# Altium PCB STM32_F4VE.PcbDoc
Units mil, origin at the board's own origin, x right, y up, seen from the top; angles counter-clockwise.
Board outline 4870 x 4565 mil, 2 copper layers (TopLayer, BottomLayer); 16 components, 107 nets, 308 pads, 0 vias.
Unrouted connection lines stored in the file: 187.
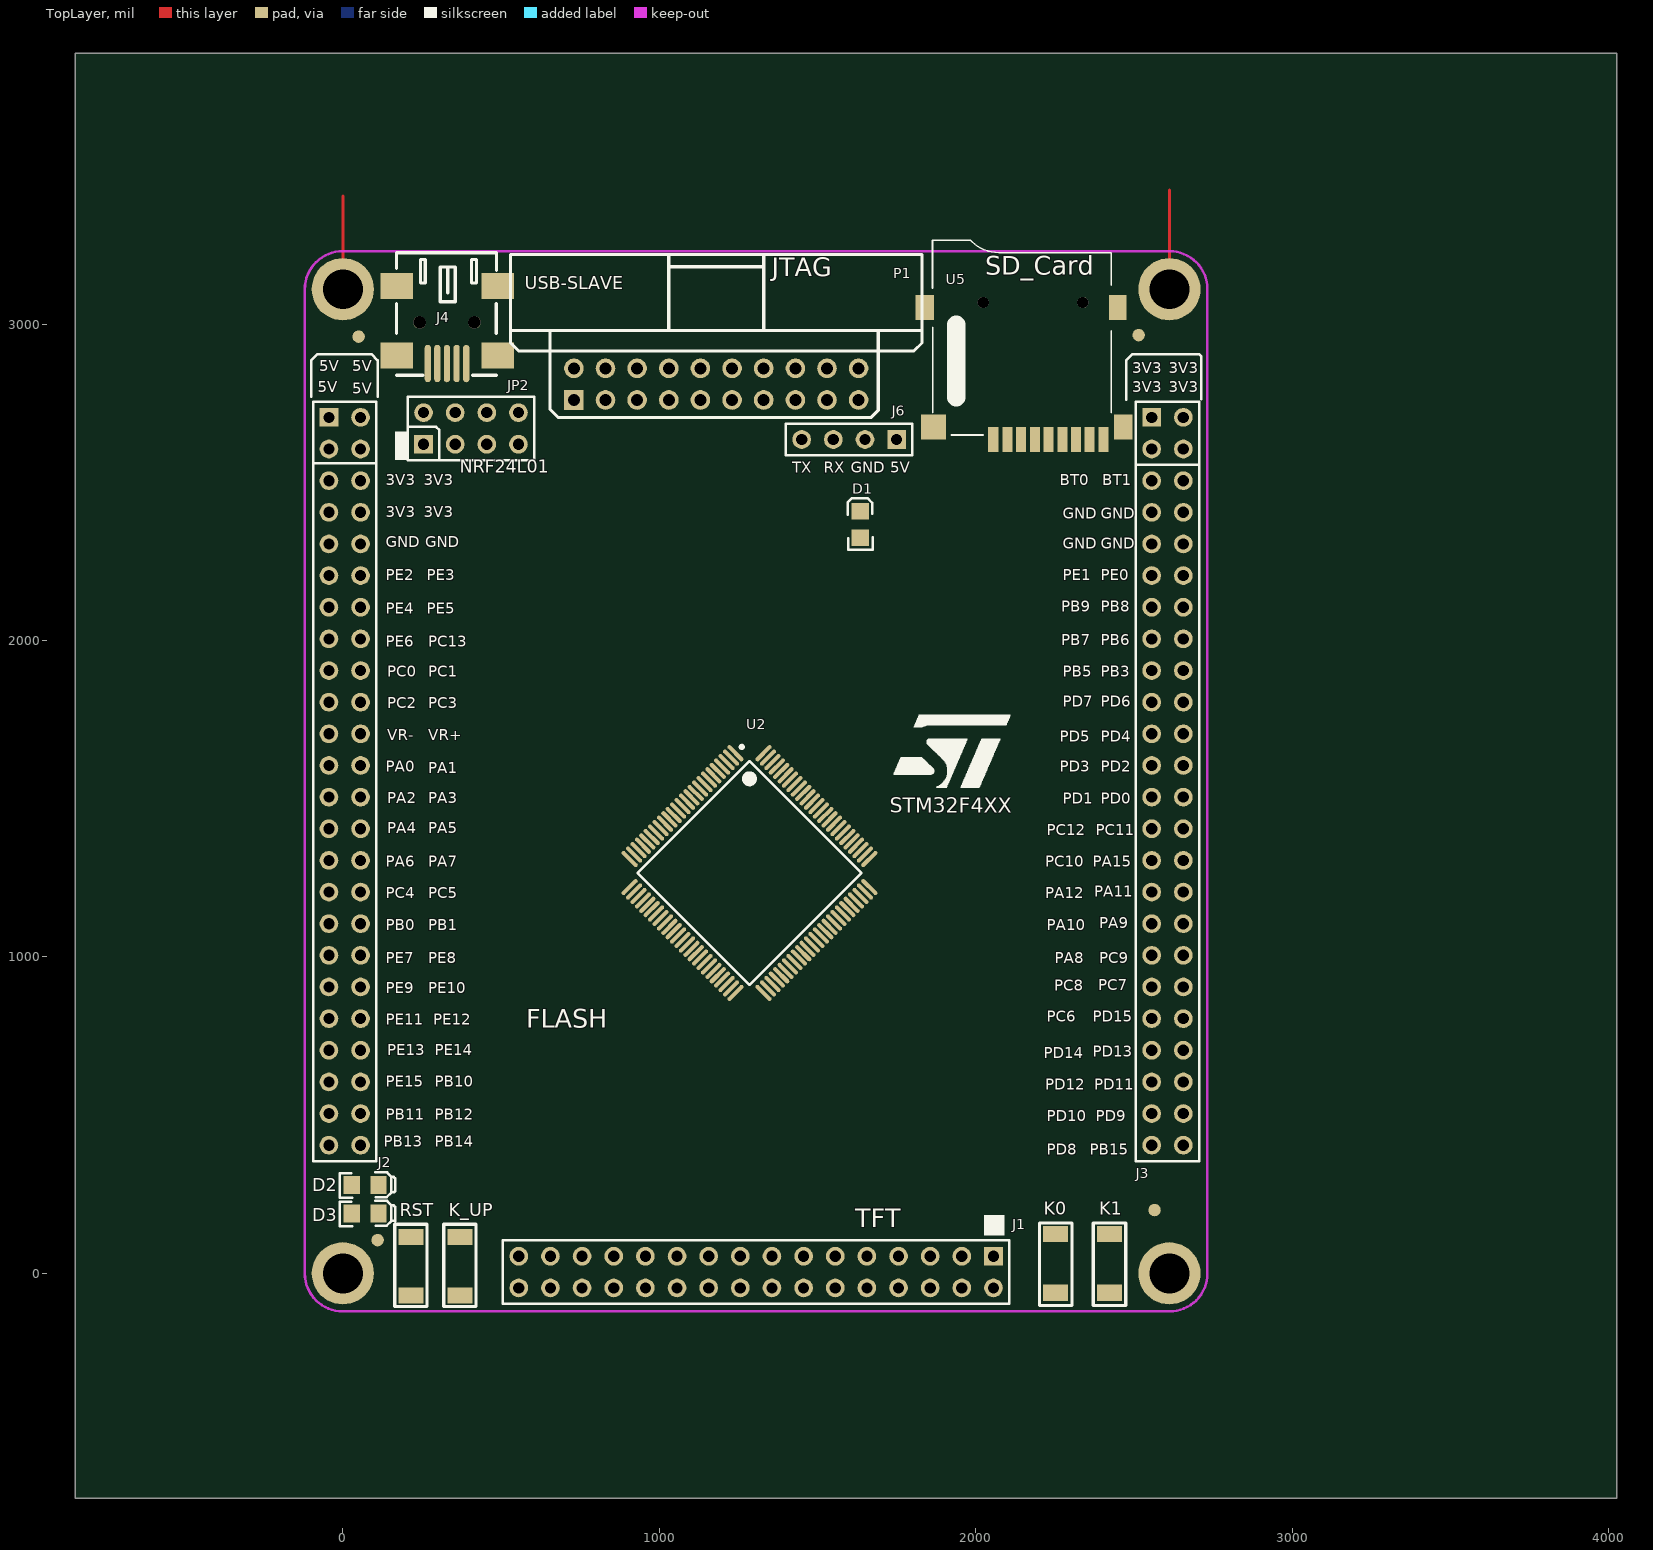
[diagram p0: TopLayer view]
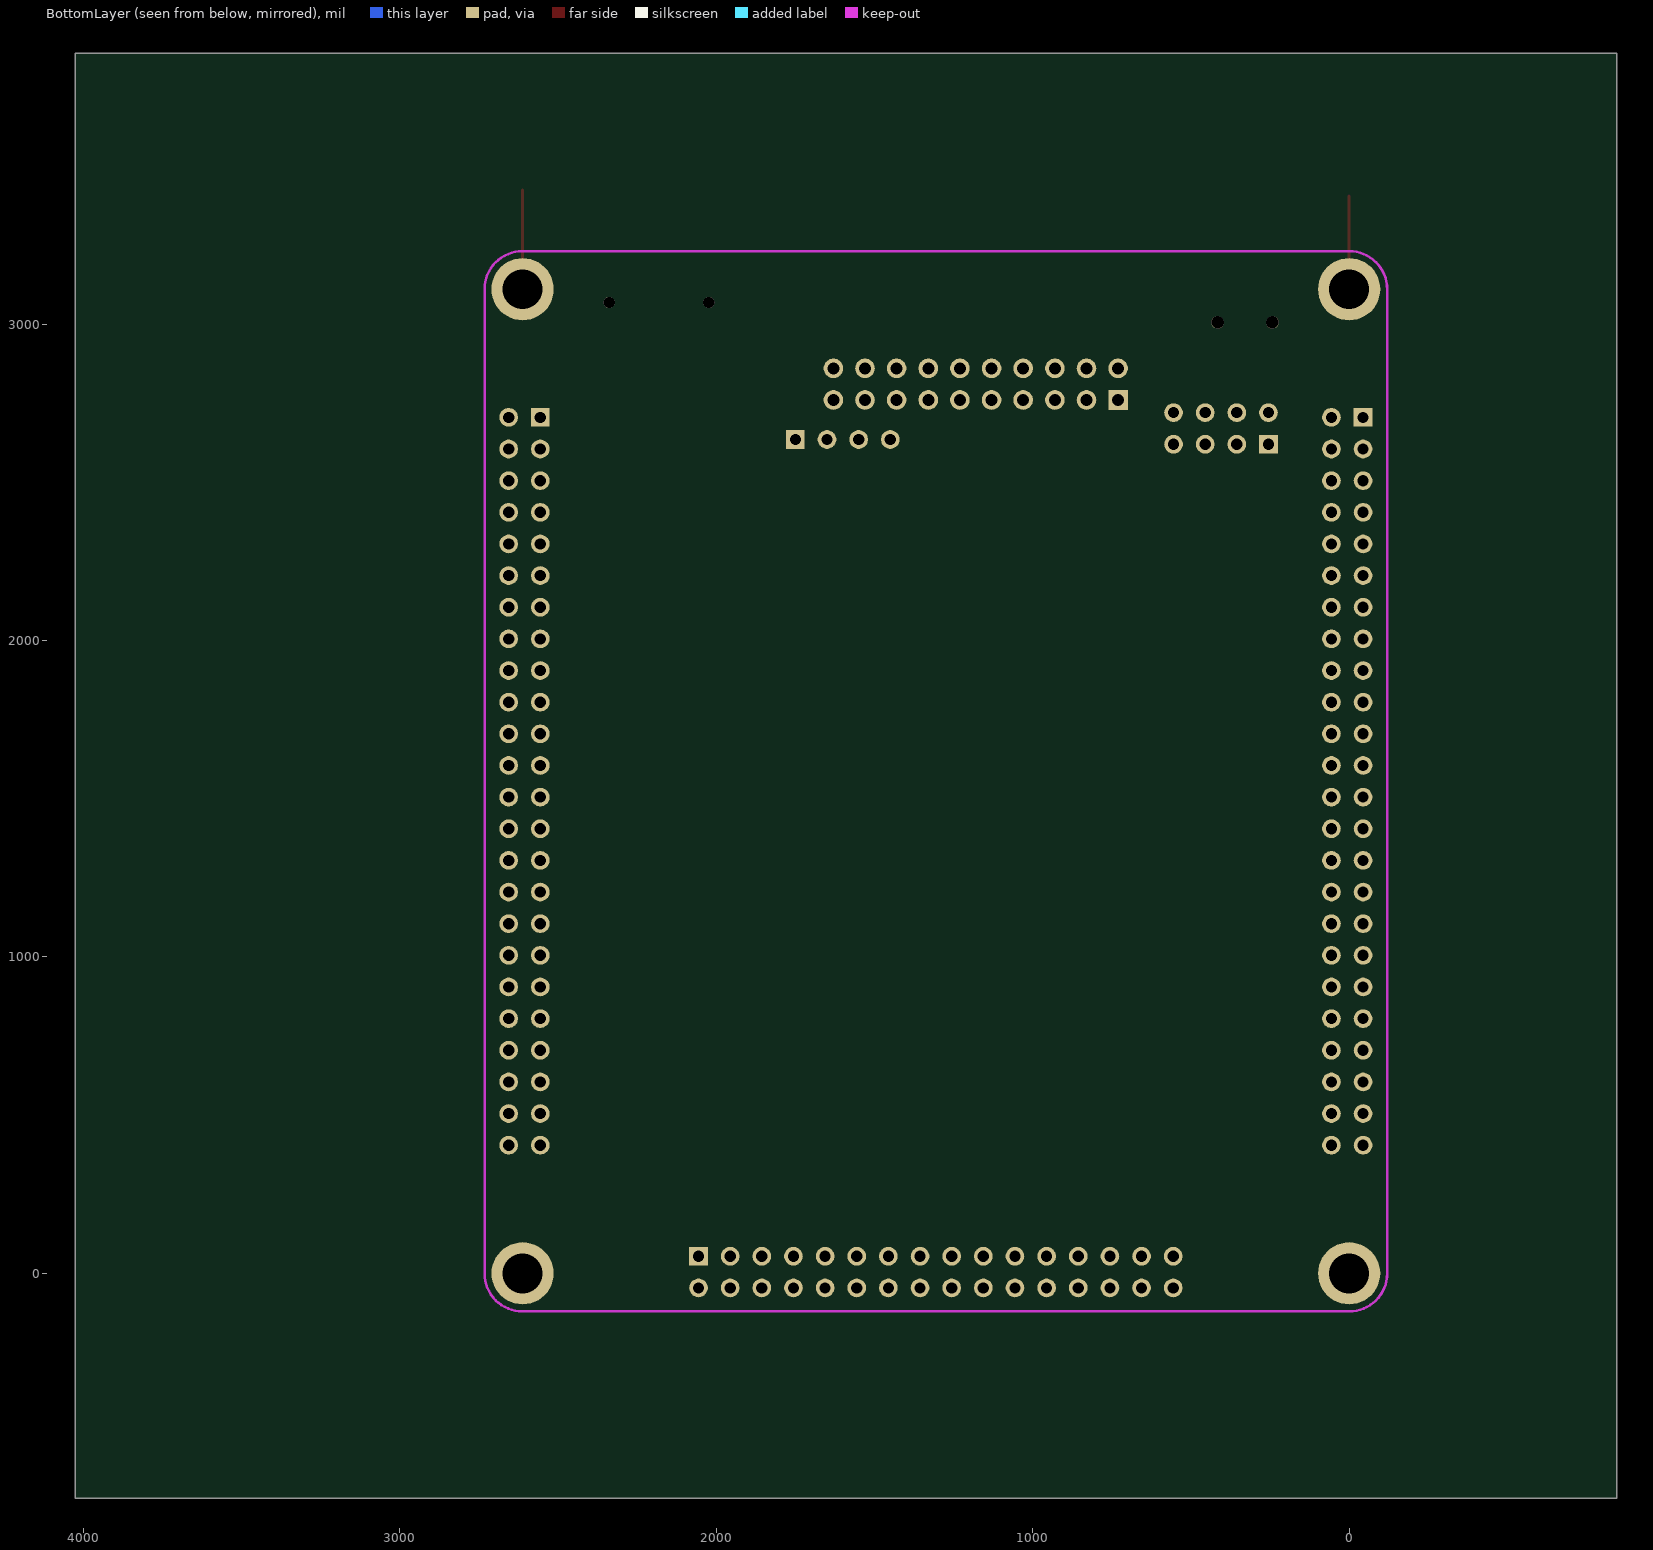
[diagram p1: BottomLayer view, seen from below]

## Layer stack, top to bottom
TopSolder: solder mask 0.4, Solder Resist, Dk 3.5
TopLayer: signal copper 1.4
Dielectric1: core 12.6, FR-4, Dk 4.8
BottomLayer: signal copper 1.4
BottomSolder: solder mask 0.4, Solder Resist, Dk 3.5

## Board outline
-845,-710 -845,3855 4025,3855 4025,-710

## Design rules (kind name [scope] priority, off if disabled: settings)
Clearance [All] p1: gap=16 ignorepadtopadclearanceinfootprint=FALSE except(0: Arc-Hole Track-Hole SMDPad-Hole THPad-Hole Via-Hole Fill-Hole Poly-Hole Region-Hole Text-Hole)
ComponentClearance [All] p1: gap=1 collisioncheckmode=3 verticalgap=1 showdistances=FALSE
DiffPairsRouting DiffPairsRouting_1 [All] p2: maxlimit=10 minlimit=10 mostfreqgap=10 toplayer_minwidth=15 toplayer_maxwidth=15 toplayer_prefwidth=15 bottomlayer_minwidth=15 bottomlayer_maxwidth=15 bottomlayer_prefwidth=15 maxuncoupledlength=500
FabricationTestPointUsage TestPointUsage [All] p1: valid=0 allowmultiple=FALSE
FabricationTestPointUsage TestPointUsage_1 [All] p2: valid=0 allowmultiple=FALSE
FabricationTestpoint Testpoint [(IsPad And (OnTopLayer Or OnBottomLayer))] p1: side=3 testpointundercomponent=TRUE minsize=40 maxsize=100 preferedsize=60 minholesize=0 maxholesize=40 preferedholesize=32 testpointgrid=1 allowsidetop=TRUE allowsidebottom=TRUE usegrid=TRUE gridtolerance=0.01
FabricationTestpoint Testpoint_1 [(IsPad And (OnTopLayer Or OnBottomLayer))] p2: side=3 testpointundercomponent=TRUE minsize=40 maxsize=100 preferedsize=60 minholesize=20 maxholesize=40 preferedholesize=32 testpointgrid=1 allowsidetop=TRUE allowsidebottom=TRUE usegrid=TRUE gridtolerance=0.01
FanoutControl Fanout_LCC [IsLCC] p1: bgadir=Out bgaviamode=Centered fanoutstyle=Auto fanoutdirection=Alternating viagrid=1 // Fanout_LCC (Default Rule)
FanoutControl Fanout_BGA [IsBGA] p2: bgadir=Out bgaviamode=Centered fanoutstyle=Auto fanoutdirection=Alternating viagrid=1 // Fanout_BGA (Default Rule)
FanoutControl Fanout_Default [All] p4: bgadir=Out bgaviamode=Centered fanoutstyle=Auto fanoutdirection=Alternating viagrid=1 // Fanout_Default (Default Rule)
FanoutControl Fanout_Small [(CompPinCount < 5)] p5: bgadir=Out bgaviamode=Centered fanoutstyle=Auto fanoutdirection=OutThenIn viagrid=1 // Fanout_Small (Default Rule)
FanoutControl Fanout_BGA_1 [IsBGA] p6: bgadir=Out bgaviamode=Centered fanoutstyle=Auto fanoutdirection=Alternating viagrid=1 // Fanout_BGA (Default Rule)
FanoutControl Fanout_LCC_1 [IsLCC] p7: bgadir=Out bgaviamode=Centered fanoutstyle=Auto fanoutdirection=Alternating viagrid=1 // Fanout_LCC (Default Rule)
FanoutControl Fanout_SOIC_1 [IsSOIC] p8: bgadir=Out bgaviamode=Centered fanoutstyle=Auto fanoutdirection=Alternating viagrid=1 // Fanout_SOIC (Default Rule)
FanoutControl Fanout_Small_1 [(CompPinCount < 5)] p9: bgadir=Out bgaviamode=Centered fanoutstyle=Auto fanoutdirection=OutThenIn viagrid=1 // Fanout_Small (Default Rule)
FanoutControl Fanout_Default_1 [All] p10: bgadir=Out bgaviamode=Centered fanoutstyle=Auto fanoutdirection=Alternating viagrid=1 // Fanout_Default (Default Rule)
HoleSize HoleSize_1 [All] p2: absolutevalues=TRUE maxlimit=100 minlimit=1 maxpercent=80.000 minpercent=20.000
LayerPairs LayerPairs_1 [All] p2: enforce=TRUE
PasteMaskExpansion PasteMaskExpansion_1 [All] p2: expansion=0
PlaneClearance PlaneClearance_1 [All] p2: clearance=0
PlaneConnect [All] p1: planeconnectstyle=Direct reliefexpansion=20 reliefentries=4 reliefconductorwidth=10 reliefairgap=10
PolygonConnect [(InPadClass('All Pads'))] p1: connectstyle=Relief reliefconductorwidth=10 reliefentries=4 polygonreliefangle="90 Angle" airgapwidth=10
PolygonConnect PolygonConnect_1 [All] p2: connectstyle=Direct reliefconductorwidth=10 reliefentries=4 polygonreliefangle="90 Angle" airgapwidth=10
RoutingPriority RoutingPriority_1 [All] p2: routingpriority=0
RoutingTopology RoutingTopology_1 [All] p2: topology=Shortest
RoutingVias [All] p1: holewidth=12 width=20 viastyle="Through Hole" minholewidth=12 minwidth=20 maxholewidth=12 maxwidth=20
ShortCircuit ShortCircuit_1 [All] p2: allowed=FALSE
SilkToSolderMaskClearance SilkscreenOverComponentPads [IsPad] p1: minsilkscreentomaskgap=10 clearancetoexposedcopper=TRUE
SolderMaskExpansion [All] p1: expansion=4
SolderMaskExpansion SolderMaskExpansion_1 [All] p2: expansion=4
UnRoutedNet UnRoutedNet_1 [All] p2:
Width [All] p1: maxlimit=40 minlimit=7.87 preferedwidth=7.87 minimp=50.000000 maximp=50.000000 favimp=50.000000
21 further rules are at their usual default settings.

## Classes and differential pairs
component class STM32_F4VE: D2 D3 J1 J2 J3 J4 J6 JP2 K0 K_UP P1 R17 RST U2 U5

## Components (designator, comment, footprint, x,y, rotation, side; value= is the part's Value field where it differs from the comment)
D1 "LED" LED0805 1635,2325 r90 top
D2 "LED" LED0805 28.68,278.97 r0 top
D3 "LED" LED0805 28.68,188.97 r0 top
J1 "Header 16X2" IDE2X16 2056.02,53.97 r180 top
J2 "Header 24X2" IDE2X24 -43.98,2705 r270 top
J3 "Header 24X2" IDE2X24 2556.02,2705 r270 top
J4 "usb" Mini_USB 390,2875 r0 top
J6 "ISP_COM" HDR1X4 1750,2635 r180 top
JP2 "NRF2401" IDE2X4 255,2620 r0 top
K0 "SW-PB" SW-SPST 2252.68,123.97 r270 top
K1 "SW-PB" SW-SPST 2422.68,123.97 r270 top
K_UP "SW-PB" SW-SPST 370,-70 r90 top
P1 "ARM_JTAG" JTAG-20P 730,2760 r0 top
RST "SW-PB" SW-SPST 215,-70 r90 top
U2 "STM32F407VET6" LQFP100 1285,1265 r315 top
U5 "MiniSD" TF_SD 2055,2635 r0 top

## Footprints (in the part's own frame and the unit in brackets; to place one, negate y for a bottom-side part, rotate by r counter-clockwise, add the part's x,y. Pads: shape width x height; smd on the part's side, far side on the other; paste and mask are expansions set on the pad)
HDR1X4 [mm] "Connector; Header; 4 Position"
  rect 1.5x1.5 hole 0.9: 1(0,0)
  round 1.5 hole 0.9: 2(2.54,0) 3(5.08,0) 4(7.62,0)
  silkscreen extent -1.27,-1.27 8.89,1.27
IDE2X4 [mm]
  rect 1.5x1.5 hole 0.9: 1(0,0)
  round 1.5 hole 0.9: 2(0,2.54) 3(2.54,0) 4(2.54,2.54) 5(5.08,0) 6(5.08,2.54) 7(7.62,0) 8(7.62,2.54)
  silkscreen extent -1.27,-1.27 8.89,3.81
IDE2X16 [mm]
  rect 1.5x1.5 hole 0.9: 1(0,0)
  round 1.5 hole 0.9: 2(0,2.54) 3(2.54,0) 4(2.54,2.54) 5(5.08,0) 6(5.08,2.54) 7(7.62,0) 8(7.62,2.54) 9(10.16,0) 10(10.16,2.54) 11(12.7,0) 12(12.7,2.54) 13(15.24,0) 14(15.24,2.54) 15(17.78,0) 16(17.78,2.54) 17(20.32,0) 18(20.32,2.54) 19(22.86,0) 20(22.86,2.54) 21(25.4,0) 22(25.4,2.54) 23(27.94,0) 24(27.94,2.54) 25(30.48,0) 26(30.48,2.54) 27(33.02,0) 28(33.02,2.54) 29(35.56,0) 30(35.56,2.54) 31(38.1,0) 32(38.1,2.54)
  silkscreen extent -1.27,-3.3 39.37,3.81
IDE2X24 [mm]
  rect 1.5x1.5 hole 0.9: 1(0,0)
  round 1.5 hole 0.9: 2(0,2.54) 3(2.54,0) 4(2.54,2.54) 5(5.08,0) 6(5.08,2.54) 7(7.62,0) 8(7.62,2.54) 9(10.16,0) 10(10.16,2.54) 11(12.7,0) 12(12.7,2.54) 13(15.24,0) 14(15.24,2.54) 15(17.78,0) 16(17.78,2.54) 17(20.32,0) 18(20.32,2.54) 19(22.86,0) 20(22.86,2.54) 21(25.4,0) 22(25.4,2.54) 23(27.94,0) 24(27.94,2.54) 25(30.48,0) 26(30.48,2.54) 27(33.02,0) 28(33.02,2.54) 29(35.56,0) 30(35.56,2.54) 31(38.1,0) 32(38.1,2.54) 33(40.64,0) 34(40.64,2.54) 35(43.18,0) 36(43.18,2.54) 37(45.72,0) 38(45.72,2.54) 39(48.26,0) 40(48.26,2.54) 41(50.8,0) 42(50.8,2.54) 43(53.34,0) 44(53.34,2.54) 45(55.88,0) 46(55.88,2.54) 47(58.42,0) 48(58.42,2.54)
  silkscreen extent -1.27,-1.27 59.69,3.81
JTAG-20P [mil]
  rect 62x62 hole 38: 1(0,0)
  round 62 hole 38: 2(0,100) 3(100,0) 4(100,100) 5(200,0) 6(200,100) 7(300,0) 8(300,100) 9(400,0) 10(400,100) 11(500,0) 12(500,100) 13(600,0) 14(600,100) 15(700,0) 16(700,100) 17(800,0) 18(800,100) 19(900,0) 20(900,100)
  silkscreen extent -200,-55 1100,460
LED0805 [mil]
  rect 52x56 smd: 1(0,0) 2(84,0)
  silkscreen extent -38,-40 125,40
LQFP100 [mm] "LQFP, 100-Leads, Body 16.2x16.2mm (max), Pitch 0.50mm, IPC Medium Density"
  oval 1.7x0.33 smd: 1(-7.6,6) 2(-7.6,5.5) 3(-7.6,5) 4(-7.6,4.5) 5(-7.6,4) 6(-7.6,3.5) 7(-7.6,3) 8(-7.6,2.5) 9(-7.6,2) 10(-7.6,1.5) 11(-7.6,1) 12(-7.6,0.5) 13(-7.6,0) 14(-7.6,-0.5) 15(-7.6,-1) 16(-7.6,-1.5) 17(-7.6,-2) 18(-7.6,-2.5) 19(-7.6,-3) 20(-7.6,-3.5) 21(-7.6,-4) 22(-7.6,-4.5) 23(-7.6,-5) 24(-7.6,-5.5) 25(-7.6,-6) 51(7.6,-6) 52(7.6,-5.5) 53(7.6,-5) 54(7.6,-4.5) 55(7.6,-4) 56(7.6,-3.5) 57(7.6,-3) 58(7.6,-2.5) 59(7.6,-2) 60(7.6,-1.5) 61(7.6,-1) 62(7.6,-0.5) 63(7.6,0) 64(7.6,0.5) 65(7.6,1) 66(7.6,1.5) 67(7.6,2) 68(7.6,2.5) 69(7.6,3) 70(7.6,3.5) 71(7.6,4) 72(7.6,4.5) 73(7.6,5) 74(7.6,5.5) 75(7.6,6)
  oval 0.33x1.7 smd: 26(-6,-7.6) 27(-5.5,-7.6) 28(-5,-7.6) 29(-4.5,-7.6) 30(-4,-7.6) 31(-3.5,-7.6) 32(-3,-7.6) 33(-2.5,-7.6) 34(-2,-7.6) 35(-1.5,-7.6) 36(-1,-7.6) 37(-0.5,-7.6) 38(0,-7.6) 39(0.5,-7.6) 40(1,-7.6) 41(1.5,-7.6) 42(2,-7.6) 43(2.5,-7.6) 44(3,-7.6) 45(3.5,-7.6) 46(4,-7.6) 47(4.5,-7.6) 48(5,-7.6) 49(5.5,-7.6) 50(6,-7.6) 76(6,7.6) 77(5.5,7.6) 78(5,7.6) 79(4.5,7.6) 80(4,7.6) 81(3.5,7.6) 82(3,7.6) 83(2.5,7.6) 84(2,7.6) 85(1.5,7.6) 86(1,7.6) 87(0.5,7.6) 88(0,7.6) 89(-0.5,7.6) 90(-1,7.6) 91(-1.5,7.6) 92(-2,7.6) 93(-2.5,7.6) 94(-3,7.6) 95(-3.5,7.6) 96(-4,7.6) 97(-4.5,7.6) 98(-5,7.6) 99(-5.5,7.6) 100(-6,7.6)
  silkscreen extent -7.72,-6.35 6.35,6.85, body extent -7.05,-7.05 7.05,7.05, height 1.6
Mini_USB [mm]
  oval 0.5x3 smd: 1(0,0) 2(-0.775,0.009) 3(-1.549,0) 4(-2.324,0.009) 5(-3.086,0.009)
  rect 2.6x2.1 smd: ""(-5.588,0.635) ""(-5.588,6.223) ""(2.54,0.635) ""(2.54,6.223)
  round 1 hole 1: ""(-3.749,3.299) ""(0.651,3.299)
  silkscreen extent -5.59,-0.94 2.41,8.89
SW-SPST [mm]
  rect 1.3x2 smd paste+0 mask+0.2: 1(0,0) 2(4.7,0)
  silkscreen extent -0.89,-1.3 5.72,1.3
TF_SD [mm]
  round 0.9 hole 0.9 unplated: 0(-0.8,11) 0(7.2,11)
  rect 0.85x2 smd: 1(0,0)
  rect 0.8x2 smd: 2(1.15,0) 3(2.25,0) 4(3.35,0) 5(4.45,0) 6(5.55,0) 7(6.65,0) 8(7.75,0) 9(8.85,0)
  rect 1.5x2 smd: 10(-5.5,10.6) 10(10.45,1)
  rect 2x2 smd: 10(-4.8,1)
  rect 1.4x2 smd: 10(10,10.6)
  silkscreen extent -4.87,0.36 9.49,16

## Part data
J1: "Header, 16-Pin, Dual row"
J2 J3: "Header, 24-Pin, Dual row"
J6: library part "Header 4", "Header, 4-Pin"
JP2: library part "Header 4X2", "Header, 4-Pin, Dual row"
P1: library part JTAG, "JTAG"

## Free pads (board coordinates)
  round 196.85 hole 125.98: ""(0,0) ""(0,3110) ""(2612.05,0) ""(2612.05,3110)
  round 39.37 smd: ""(50,2960) ""(110,105) ""(2515,2965) ""(2565,200)

## Nets (pads, with @x,y where several pads share a name; then routed paths per layer and width w, separated by ;. In a path a pad name is that pad's centre, name@x,y a point inside that pad or via, vN(x,y) a via of type N, cw(c..) or ccw(c..) an arc to the next point about the centre after c; other vN are vias at no path point)
3V3: D2.1 D3.1 J1.31 J2.5 J2.6 J2.7 J2.8 J3.1 J3.2 J3.3 J3.4 JP2.2 P1.1 P1.2 U2.11 U2.28 U2.50 U2.75 U2.100 U5.4
5V: J2.1 J2.2 J2.3 J2.4 J6.1
BOOT0: U2.94
F_CS: J2.33 U2.35
FSMC_A18: J1.21 J3.42 U2.60
FSMC_D0: J1.18 J3.41 U2.61
FSMC_D1: J1.17 J3.40 U2.62
FSMC_D2: J1.16 J3.26 U2.81
FSMC_D3: J1.15 J3.25 U2.82
FSMC_D4: J1.14 J2.35 U2.38
FSMC_D5: J1.13 J2.36 U2.39
FSMC_D6: J1.12 J2.37 U2.40
FSMC_D7: J1.11 J2.38 U2.41
FSMC_D8: J1.10 J2.39 U2.42
FSMC_D9: J1.9 J2.40 U2.43
FSMC_D10: J1.8 J2.41 U2.44
FSMC_D11: J1.7 J2.42 U2.45
FSMC_D12: J1.6 J2.43 U2.46
FSMC_D13: J1.5 J3.47 U2.55
FSMC_D14: J1.4 J3.46 U2.56
FSMC_D15: J1.3 J3.45 U2.57
FSMC_NE1: J1.22 J3.19 U2.88
FSMC_NOE: J1.19 J3.22 U2.85
FSMC_NWE: J1.20 J3.21 U2.86
GND: D1.2 J1.1 J1.30 J1.32 J2.9 J2.10 J3.7 J3.8 J3.9 J3.10 J4.5 J4.@170,2900 J4.@170,3120 J4.@490,2900 J4.@490,3120 J6.2 JP2.1 K0.2 K1.2 P1.4 P1.6 P1.8 P1.10 P1.12 P1.14 P1.16 P1.18 P1.20 RST.1 U2.10 U2.27 U2.74 U2.99 U5.6 U5.9 U5.10
KEY0: J2.13 K0.1 U2.3
KEY1: J2.12 K1.1 U2.2
LCD_BL: J2.34 U2.36
NetB1_1: 
NetC10_2: U2.12
NetC11_1: U2.13
NetC21_2: U2.49
NetC22_2: U2.73
NetD1_1: D1.1
NetD2_2: D2.2
NetD3_2: D3.2
NetJ1_27: J1.27
NetJ1_28: J1.28
NetJ3_5: J3.5
NetJ3_6: J3.6
NetJ4_1: J4.1
NetJ4_2: J4.2
NetJ4_3: J4.3
NetK_UP_1: K_UP.1
NetQ2_1: 
NetR22_1: 
NRF_CE: J3.16 JP2.3 U2.92
NRF_CS: J3.15 JP2.4 U2.93
NRF_IRQ: J3.14 JP2.8 U2.95
PA0/WK_UP: J2.23 K_UP.2 U2.23
PA1: J2.24 U2.24
PA2: J2.25 U2.25
PA3: J2.26 U2.26
PA4: J2.27 U2.29
PA5: J2.28 U2.30
PA6: J2.29 U2.31
PA7: J2.30 U2.32
PA8: J3.35 U2.67
PA9/TXD1: J3.34 J6.4 U2.68
PA10/RXD1: J3.33 J6.3 U2.69
PA11/USB_DM: J3.32 U2.70
PA12/USB_DP: J3.31 U2.71
PA13/TMS: P1.7 U2.72
PA14/TCK: P1.9 U2.76
PA15/TDI: J3.30 P1.5 U2.77
PB2/BOOT1: U2.37
PB3/TDO: J3.18 JP2.5 P1.13 U2.89
PB4/TRST: JP2.7 P1.3 U2.90
PB5: J3.17 JP2.6 U2.91
PB9: J3.13 U2.96
PB10: J2.44 U2.47
PB11: J2.45 U2.48
PB12: J1.24 J2.46 U2.51
PB13: J1.23 J2.47 U2.52
PB14: J1.26 J2.48 U2.53
PB15: J1.25 J3.48 U2.54
PC0: J2.17 U2.15
PC1: J2.18 U2.16
PC2: J2.19 U2.17
PC3: J2.20 U2.18
PC4: J2.31 U2.33
PC5: J2.32 U2.34
PC6: J3.39 U2.63
PC7: J3.38 U2.64
PC8: J3.37 U2.65 U5.7
PC9: J3.36 U2.66 U5.8
PC10: J3.29 U2.78 U5.1
PC11: J3.28 U2.79 U5.2
PC12: J3.27 U2.80 U5.5
PC13: J2.16 U2.7
PC14: U2.8
PC15: U2.9
PD2: J3.24 U2.83 U5.3
PD3: J3.23 U2.84
PD6: J3.20 U2.87
PD11: J3.44 U2.58
PD12: J3.43 U2.59
PE0: J3.12 U2.97
PE1: J3.11 U2.98
PE2: J2.11 U2.1
PE5: J2.14 U2.4
PE6: J2.15 U2.5
RST: J1.2 P1.15 RST.2 U2.14
VBAT: U2.6
VDDA: U2.19 U2.22
VREF+: J2.22 U2.21
VREF-: J2.21 U2.20
pads on no net: J1.29 J4.4 J4.@242.38,3004.87 J4.@415.61,3004.87 P1.11 P1.17 P1.19 U5.0
copper on no net: | length 608
  TopLayer w10: 0,3110 0,3405 ; 2612.05,3110 2612.05,3422.95

## Keep-outs
KeepOutLayer:
  lines w8: 2612.05,3230.21 cw(c2612.05,3110) 2732.26,3110 2732.26,0 cw(c2612.05,0) 2612.05,-120.21 0,-120.21 cw(c0,0) -120.21,0 -120.21,3110 cw(c0,3110) 0,3230.21 2612.05,3230.43

## Silkscreen, mask and mechanical layers (free items; w line width, h text height)
TopOverlay:
  drawing of 427 lines, arcs and shapes, not listed
  text "SD_Card" at 2030,3135 h100
  text "JTAG" at 1355,3130 h100
  text "USB-SLAVE" at 575,3095 h70
  text "5V" at -75,2850 h35
  text "5V" at 30,2850 h35
  text "3V3" at 2495,2845 h35
  text "3V3" at 2610,2845 h35
  text "5V" at -80,2785 h35
  text "3V3" at 2495,2785 h35
  text "3V3" at 2610,2785 h35
  text "5V" at 30,2780 h35
  text "TX" at 1420,2530 h35
  text "RX" at 1520,2530 h35
  text "GND" at 1605,2530 h35
  text "5V" at 1730,2530 h35
  text "NRF24L01" at 370,2515 h70
  text "3V3" at 135,2490 h35
  text "3V3" at 255,2490 h35
  text "BT0" at 2265,2490 h35
  text "BT1" at 2400,2490 h35
  text "3V3" at 135,2390 h35
  text "3V3" at 255,2390 h35
  text "GND" at 2275,2385 h35
  text "GND" at 2395,2385 h35
  text "GND" at 135,2295 h35
  text "GND" at 260,2295 h35
  text "GND" at 2275,2290 h35
  text "GND" at 2395,2290 h35
  text "PE2" at 135,2190 h35
  text "PE3" at 265,2190 h35
  text "PE1" at 2275,2190.13 h35
  text "PE0" at 2395,2190.13 h35
  text "PB9" at 2270,2090 h35
  text "PB8" at 2395,2090 h35
  text "PE4" at 135,2085 h35
  text "PE5" at 265,2085 h35
  text "PB7" at 2270,1985 h35
  text "PB6" at 2395,1985 h35
  text "PE6" at 135,1980 h35
  text "PC13" at 270,1980 h35
  text "PC0" at 140,1885 h35
  text "PC1" at 270,1885 h35
  text "PB5" at 2275,1885 h35
  text "PB3" at 2395,1885 h35
  text "PD7" at 2275,1790 h35
  text "PD6" at 2395,1790 h35
  text "PC2" at 140,1785 h35
  text "PC3" at 270,1785 h35
  text "VR-" at 140,1685 h35
  text "VR+" at 270,1685 h35
  text "PD5" at 2265,1680 h35
  text "PD4" at 2395,1680 h35
  text "PA0" at 135,1585 h35
  text "PD3" at 2265,1585 h35
  text "PD2" at 2395,1585 h35
  text "PA1" at 270,1580 h35
  text "PA2" at 140,1485 h35
  text "PA3" at 270,1485 h35
  text "PD1" at 2275,1484.75 h35
  text "PD0" at 2395,1484.75 h35
  text "STM32F4XX" at 1727.68,1438.97 h80
  text "PA4" at 140,1390 h35
  text "PA5" at 270,1390 h35
  text "PC12" at 2225,1385 h35
  text "PC11" at 2380,1385 h35
  text "PA6" at 135,1285 h35
  text "PA7" at 270,1285 h35
  text "PC10" at 2220,1285 h35
  text "PA15" at 2370,1285 h35
  text "PA11" at 2375,1190 h35
  text "PC4" at 135,1185 h35
  text "PC5" at 270,1185 h35
  text "PA12" at 2220,1185 h35
  text "PA9" at 2390,1090 h35
  text "PB0" at 135,1085 h35
  text "PB1" at 270,1085 h35
  text "PA10" at 2225,1085 h35
  text "PE7" at 135,980 h35
  text "PE8" at 270,980 h35
  text "PA8" at 2250,980 h35
  text "PC9" at 2390,980 h35
  text "PC7" at 2387.68,893.97 h35
  text "PC8" at 2248.62,893.62 h35
  text "PE9" at 135,885 h35
  text "PE10" at 270,885 h35
  text "PC6" at 2225,795 h35
  text "PD15" at 2370,795 h35
  text "PE11" at 135,785 h35
  text "PE12" at 285,785 h35
  text "FLASH" at 580,755 h100
  text "PE13" at 140,690 h35
  text "PE14" at 290,690 h35
  text "PD13" at 2370,685 h35
  text "PD14" at 2215,680 h35
  text "PE15" at 135,590 h35
  text "PB10" at 290,590 h35
  text "PD12" at 2220,580 h35
  text "PD11" at 2375,580 h35
  text "PB11" at 135,485 h35
  text "PB12" at 290,485 h35
  text "PD10" at 2225,480 h35
  text "PD9" at 2380,480 h35
  text "PB13" at 130,400 h35
  text "PB14" at 290,400 h35
  text "PD8" at 2225,375 h35
  text "PB15" at 2360,375 h35
  text "TFT" at 1620,125 h100

## Dimensions
2056.02,-46.03 to 2556.02,605 on TopLayer
1956.02,53.97 to 2556.02,405 on TopLayer
556.02,-46.03 to 56.02,405 on TopLayer
56.02,405 to 556.02,53.97 on TopLayer
56.02,2705 to 2656.02,2605 on TopLayer
0,3405 to 2612.05,3422.95 on TopLayer
-120.21,0 to 2732.26,0 on TopOverlay
0,-120.21 to 0,3230.21 on TopOverlay